# EAGLE board MM2_plates (EAGLE 7.4.0)
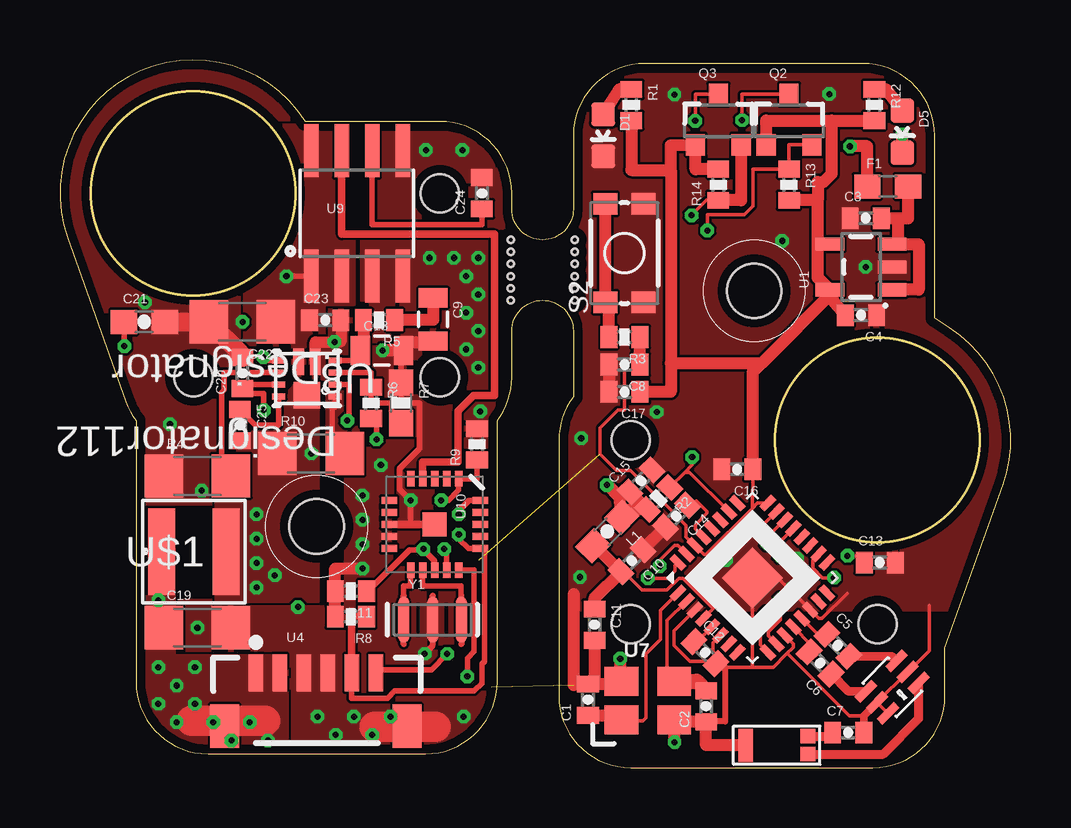
[diagram p0: board, top side]
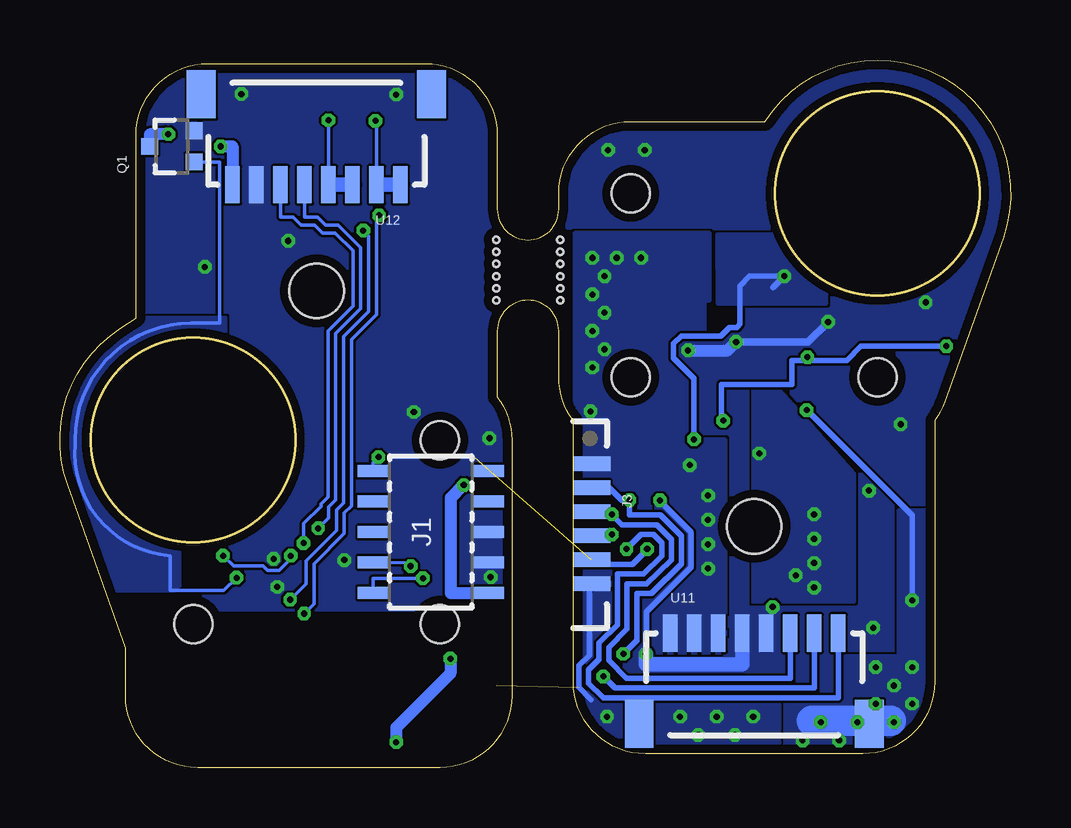
[diagram p1: board, bottom side, seen from below]

Size 39.63 x 29.51 mm. Coordinates in mm from the lower left corner, seen from the top.
Outline: 20.8,13.66 20.8,3 arc90 23.8,0 33.89,0 arc90 36.89,3 36.89,4.99 39.31,11.8 arc77 37.09,18.33 36.46,18.74 36.46,26.36 arc90 33.46,29.36 24.4,29.36 arc90 21.4,26.36 21.4,23.29 arc-180 18.83,23.29 18.83,23.95 arc90 15.84,26.94 10.24,26.94 arc167 0.32,22.09 2.74,15.28 arc18 3.17,14.48 3.17,3.58 arc90 6.17,0.58 15.23,0.58 arc90 18.23,3.58 18.23,14.48 arc37 18.83,16.28 18.83,18.21 arc-180 21.4,18.21 21.4,15.47 arc37 20.8,13.66
Outline: circle at 34.07,13.66 radius 4.26
Outline: circle at 5.55,23.95 radius 4.26
Copper layers (1*16): Top 0.0178mm / dielectric 59mil / Bottom 0.0178mm
Design rules "TA_eagle_rules_2_layer_v1-2 *": minimum track width 5mil, minimum drill 8mil, track to track 4mil, track to pad 5mil, pad to pad 5mil, via to via 5mil, smd to smd 5mil, copper to edge 15mil, drill to drill 15mil, minimum pad ring 6mil, minimum via ring 6mil, stop-mask expansion 3mil, vias tented up to drill 10mil, thermal gap 0mil
Holes 1.59 mm at 23.79,5.99 34.07,5.99 23.79,13.66 15.84,16.28 5.55,16.28 15.84,23.95
Holes 2.26 mm at 10.7,10.06 28.93,19.88
Holes 0.25 mm at 18.78,22.02 18.78,21.51 18.78,21 18.78,20.5 18.78,19.99 18.78,19.48 21.45,22.02 21.45,21.51 21.45,21 21.45,20.5 21.45,19.99 21.45,19.48
tKeepout: area 27.9,0 to 31.8,6.4
tRestrict: area 4.9,7.1 to 6.3,10.9

## Footprints (pad centres in the part's own frame; a part is rotated, then mirrored left to right if it is on the bottom)
0402-CAP = smd 0.7 x 0.9: 1 -0.65,0; 2 0.65,0
0805 = smd 0.8 x 1.2: 1 -0.9,0; 2 0.9,0
1206 = smd 1.6 x 1.8: 1 -1.4,0; 2 1.4,0
0603-CAP = smd 1.1 x 1: 1 -0.85,0; 2 0.85,0
LED-0603 = smd 1 x 1: A 0,-0.877; C 0,0.877
0603 = smd 1.1 x 1: 1 -0.85,0; 2 0.85,0
SAMTECH_FTSH-105-01 = smd 0.508 x 1.27: 1 -2.54,-2.413; 2 -2.54,2.413; 3 -1.27,-2.413; 4 -1.27,2.413; 5 0,-2.413; 6 0,2.413; 7 1.27,-2.413; 8 1.27,2.413; 9 2.54,-2.413; 10 2.54,2.413
1X06-1MM = smd 0.6 x 1.55: 1 -2.54,1.27; 2 -1.54,1.27; 3 -0.54,1.27; 4 0.46,1.27; 5 1.46,1.27; 6 2.46,1.27
SOT323 = smd 0.7 x 0.7: 1 -0.65,-0.925; 2 0.65,-0.925; 3 0,0.925
SOT23-3 = smd 0.8 x 0.9: 1 -0.95,-1; 2 0.95,-1; 3 0,1.1
0402-RES = smd 0.7 x 0.9: 1 -0.65,0; 2 0.65,0
0603-RES = smd 1.1 x 1: 1 -0.85,0; 2 0.85,0
TACTILE_SWITCH_SMD_4.6X2.8MM = smd 0.9 x 1: 1 -2.05,-0.8; 2 2.05,-0.8; 3 2.05,0.8; 4 -2.05,0.8
SOT23-5 = smd 0.55 x 1.2: 1 -0.95,-1.3; 2 0,-1.3; 3 0.95,-1.3; 4 0.95,1.3; 5 -0.95,1.3
QFN32 = smd 0.7 x 0.3: 1 -2.65,1.75; 2 -2.65,1.25; 3 -2.65,0.75; 4 -2.65,0.25; 5 -2.65,-0.25; 6 -2.65,-0.75; 7 -2.65,-1.25; 8 -2.65,-1.75; 17 2.65,-1.75; 18 2.65,-1.25; 19 2.65,-0.75; 20 2.65,-0.25; 21 2.65,0.25; 22 2.65,0.75; 23 2.65,1.25; 24 2.65,1.75 | smd 0.3 x 0.7: 9 -1.75,-2.65; 10 -1.25,-2.65; 11 -0.75,-2.65; 12 -0.25,-2.65; 13 0.25,-2.65; 14 0.75,-2.65; 15 1.25,-2.65; 16 1.75,-2.65; 25 1.75,2.65; 26 1.25,2.65; 27 0.75,2.65; 28 0.25,2.65; 29 -0.25,2.65; 30 -0.75,2.65; 31 -1.25,2.65; 32 -1.75,2.65 | smd 1.8 x 1.8: 33 0,0
EM406 = smd 0.6 x 1.55: 1 0,0; 2 1,0; 3 2,0; 4 3,0; 5 4,0; 6 5,0 | smd 1.2 x 1.8: P$1 -1.3,-2.225; P$2 6.3,-2.225
ANT_BAR = smd 0.62 x 0.61: 1 -1.3,0.37; 2 -1.3,-0.38 | smd 0.62 x 1.36: 3 1.3,0
0805_BALUN = smd 1 x 0.35: 1 -0.9,0.65; 2 -0.9,0; 3 -0.9,-0.65; 4 0.9,-0.65; 5 0.9,0; 6 0.9,0.65
FA-238 = smd 1.4 x 1.2: 1 0,-1.6; 2 2.2,-1.6; 3 2.2,0; 4 0,0
RNR0011A = smd 0.55 x 0.25: 1 -1.175,0.75; 2 -1.175,0.25; 3 -1.175,-0.25; 4 -1.175,-0.75; 7 1.175,-0.75; 8 1.175,-0.25; 9 1.175,0.25; 10 1.175,0.75 | smd 0.45 x 1.1: 5 -0.35,-0.7; 6 0.35,-0.7 | smd 1.1 x 1.1: 11 0,0.7
SO08 = smd 0.61 x 2.21: 1 -1.905,-2.616; 2 -0.635,-2.616; 3 0.635,-2.616; 4 1.905,-2.616; 5 1.905,2.616; 6 0.635,2.616; 7 -0.635,2.616; 8 -1.905,2.616
QFN20 = smd 1 x 1: 0 0,0 | smd 0.65 x 0.3: 1 -1.9,1; 2 -1.9,0.5; 3 -1.9,0; 4 -1.9,-0.5; 5 -1.9,-1; 11 1.9,-1; 12 1.9,-0.5; 13 1.9,0; 14 1.9,0.5; 15 1.9,1 | smd 0.3 x 0.65: 6 -1,-1.9; 7 -0.5,-1.9; 8 0,-1.9; 9 0.5,-1.9; 10 1,-1.9; 16 1,1.9; 17 0.5,1.9; 18 0,1.9; 19 -0.5,1.9; 20 -1,1.9
EB-85A = smd 0.6 x 1.55: 1 0,0; 2 1,0; 3 2,0; 4 3,0; 5 4,0; 6 5,0; 7 6,0; 8 7,0 | smd 1.2 x 2: P$1 -1.3,-3.775; P$2 8.3,-3.775
XAL4020 = smd 1.118 x 3.607: 1 -1.346,0; 2 1.346,0
RESONATOR-SMD = smd 0.45 x 1.905: 1 -1.2,0; 2 0,0; 3 1.2,0

## Placement (x,y rotation side)
C1  9 pF  [0402-CAP]  22.01,2.84 90 top
C2  9 pF  [0402-CAP]  26.94,2.56 90 top
C3  1.0 uF  [0402-CAP]  33.59,22.91 0 top
C4  2.2 uF  [0402-CAP]  33.39,18.87 180 top
C5  22 pF C0G 5%  [0402-CAP]  32.42,5.1 315 top
C6  22 pF C0G 5%  [0402-CAP]  31.69,4.37 135 top
C7  DNP  [0402-CAP]  32.86,1.47 0 top
C8  0.1 uF  [0402-CAP]  23.53,16.81 180 top
C9  1.2 nF  [0805]  15.56,18.69 270 top
C10  10 uF  [0402-CAP]  23.84,8.63 225 top
C11  0.1 uF  [0402-CAP]  22.29,5.97 270 top
C12  0.1 uF  [0402-CAP]  26.89,4.8 315 top
C13  0.1 uF  [0402-CAP]  34.18,8.56 0 top
C14  0.1 uF  [0402-CAP]  25.69,10.49 225 top
C15  0.1 uF  [0402-CAP]  24.22,11.96 45 top
C16  0.1 uF  [0402-CAP]  28.23,12.44 180 top
C17  10 uF  [0402-CAP]  23.53,15.67 180 top
C18  62 pF  [0805]  13.42,17.4 0 top
C19  47 uF  [1206]  5.73,5.84 0 top
C20  100 nF  [0402-CAP]  7.61,16.46 90 top
C21  2.2 uF  [0603-CAP]  3.52,18.59 0 top
C22  47 uF  [1206]  7.61,18.59 180 top
C23  0.1 uF  [0402-CAP]  11.06,18.66 0 top
C24  1 nF  [0402-CAP]  17.59,23.95 90 top
C25  100 nF  [0402-CAP]  7.51,14.28 270 top
D1  BLUE  [LED-0603]  22.64,26.36 180 top
D5  BLUE  [LED-0603]  35.12,26.52 180 top
F1  PTC0603  [0603]  34.51,24.23 0 top
J1  CORTEX_DEBUGSMD  [SAMTECH_FTSH-105-01]  24.17,9.83 90 bottom
J3  [1X06-1MM]  18.73,10.13 270 bottom
L1  10 uH  [0603]  22.82,9.85 225 top
Q1  MOSFET-NCHANNEL2N7002PW  [SOT323]  34.96,25.91 90 bottom
Q2  MOSFET-NCHANNELAO3404A  [SOT23-3]  30.39,26.97 0 top
Q3  MOSFET-NCHANNELAO3404A  [SOT23-3]  27.44,26.97 0 top
R1  330  [0402-RES]  23.81,27.63 270 top
R2  10k  [0402-RES]  24.96,11.22 225 top
R3  330  [0402-RES]  23.53,17.96 180 top
R4  143k  [1206]  5.73,12.16 0 top
R5  22.6k  [0402-RES]  13.3,18.67 180 top
R6  243k  [0402-RES]  12.97,15.21 270 top
R7  82k  [0603-RES]  14.21,15.21 270 top
R8  10k  [0402-RES]  12.13,6.3 180 top
R9  10k  [0402-RES]  17.39,13.49 90 top
R10  523k  [1206]  10.47,13.1 0 top
R11  10k  [0402-RES]  12.13,7.36 180 top
R12  330  [0402-RES]  33.95,27.63 270 top
R13  10k  [0402-RES]  30.39,24.31 270 top
R14  10k  [0402-RES]  27.44,24.31 90 top
S2  SWITCH-MOMENTARY-2SMD-4.6X2.8MM  [TACTILE_SWITCH_SMD_4.6X2.8MM]  23.53,21.46 90 top
U1  3.3V  [SOT23-5]  33.39,20.88 90 top
U2  ATSAMR21E18A-MUT  [QFN32]  28.87,7.92 45 top
U4  EM406  [EM406]  8.17,3.96 0 top
U5  PULSE_ANT_2.4GHZ  [ANT_BAR]  29.88,0.94 180 top
U6  JOHANSON_2450BM15A0015E  [0805_BALUN]  34.7,3.36 225 top
U7  FA-238  [FA-238]  23.41,3.6 0 top
U8  Value  [RNR0011A]  10.29,16.23 180 top
U9  ACS712  [SO08]  12.38,23.11 0 top
U10  ATTINY84ATTINY84-20MU  [QFN20]  15.62,10.15 270 top
U11  EB-85ASMD  [EB-85A]  14.19,5.61 0 bottom
U12  EB-85ASMD  [EB-85A]  25.44,24.31 180 bottom
U$1  XAL4020-122MEB  [XAL4020]  5.58,9.02 0 top
Y1  16MHZ  [RESONATOR-SMD]  15.53,6.17 0 top

## Library data of the parts
C1-C25 L1 R1-R3 R5-R9 R11-R14 = SparkFun-Passives
D1 D5 = SparkFun-LED; PROD_ID: DIO-08575
F1 = SparkFun-PowerIC
J1 U4 U11 U12 = SparkFun-Connectors
J3 = CSL_Components
Q1 = SparkFun-DiscreteSemi; PROD_ID: TRANS-11151
Q2 Q3 = SparkFun-DiscreteSemi; PROD_ID: TRAN-12988
R4 R10 = SparkFun-Resistors
S2 = SparkFun-Electromechanical; PROD_ID: SWCH-13065
U1 = SparkFun-PowerIC; PROD_ID: VREG-12457
U2 = atmel-samr21
U5 = bar_antenna
U6 = balun
U7 = crystals
U8 = TPS61089RNRR_4.8V; MANUFACTURER: Texas Instruments; MANUFACTURER_NAME: Texas Instruments; MANUFACTURER_PART_NUMBER: TPS61089RNRR; PARTNUMBER: TPS61089RNRR; REFDES: RefDes; TYPE: TYPE
U9 = SparkFun-AnalogIC; PROD_ID: IC-08964
U10 = SparkFun-DigitalIC
U$1 = TPS61089RNRR_4.8V
Y1 = SparkFun-FreqCtrl; PROD_ID: XTAL-08900

## Nets
3.3V: C4.2 C15.1 C16.1 C17.1 J1.1 L1.1 Q2.1 Q3.1 R1.2 R2.2 R12.2 R13.2 R14.2 U1.5 U2.24 U2.30
AVDD: C12.1 U2.5
BLINK: Q1.1 U2.18
CURSENSE: U9.7 U10.4
DVDD: C13.1 U2.21
GND: C1.2 C2.1 C3.1 C4.1 C7.2 C8.2 C9.2 C10.1 C11.2 C12.2 C13.2 C14.2 C15.2 C16.2 C17.2 C18.2 C19.2 C20.2 C21.2 C22.2 C23.2 C24.2 D1.C J1.3 J1.5 J3.6 Q1.2 R4.1 R7.1 S2.1 S2.2 U1.2 U2.3 U2.6 U2.11 U2.14 U2.33 U4.3 U4.4 U5.3 U6.2 U6.5 U6.6 U7.2 U7.4 U8.5 U9.5 U10.8 U11.4 U11.5 U12.7 Y1.2
MOTSIG0: U10.14 U11.8
MOTSIG1: U10.15 U11.7
MOTSIG2: J3.3 U10.20 U11.6
N$1: F1.1 U12.8
N$2: R3.2 S2.3 S2.4
N$3: R4.2 U8.8
N$4: U10.12 Y1.3
N$5: U10.11 Y1.1
N$6: U5.1 U6.1
N$7: C7.1 U5.2
N$8: D1.A R1.1
N$10: C5.2 U6.3
N$11: C6.1 U6.4
N$14: C9.1 R5.1
N$15: C18.1 R5.2 U8.4
N$16: C24.1 U9.6
N$19: C21.1 U8.2 U8.7
N$20: D5.A R12.1
N$21: D5.C Q1.3
N$27: C25.1 U8.10
N$28: C25.2 R10.1 U8.11 U$1.2
N$29: R10.2 U8.1
N$31: R6.1 R7.2 U8.3
PA24/USBDM: U2.22 U12.6
PA25/USBDP: U2.23 U12.5
RESET: C8.1 J1.10 J3.5 R2.1 R3.1 R11.1 U2.26 U10.13
RFN: C5.1 U2.13
RFP: C6.2 U2.12
SCL: J3.2 R9.1 U4.6 U10.1
SCL_HV: Q2.3 U12.3 U12.4
SCL_LV: Q2.2 R13.1 U2.10
SDA: J3.4 R8.1 U4.5 U10.16
SDA_HV: Q3.3 U12.1 U12.2
SDA_LV: Q3.2 R14.1 U2.9
SWCLK: J1.4 U2.31
SWDIO: J1.2 U2.32
V_BATT: C19.1 C20.1 U4.1 U4.2 U8.9 U$1.1
V_MOT_UNSENSE: C22.1 C23.1 R6.2 U8.6 U9.1 U9.2 U9.8
VDDANA: C10.2 C11.1 L1.2 U2.4
VDDCORE: C14.1 U2.29
VIN: C3.2 F1.2 U1.1 U1.3
VMOT: J3.1 R8.2 R9.2 R11.2 U9.3 U9.4 U10.9 U11.1 U11.2 U11.3
XIN: C1.1 U2.1 U7.1
XOUT: C2.2 U2.2 U7.3

## Tracks (layer width: path | path; a pad name or v marks a point on that pad's centre or on a via)
3.3V  (via drill 0.25)
  Top 0.152: 23.63,10.3 L1.1 | 28.87,10.82 26.94,8.89 26.84,8.89 U2.30 26.1,9.63 26.1,10.11 25.21,11 25.03,11 24.8,10.76 R2.2 | 28.87,10.82 C16.1 | U2.24 29.08,11.03 28.87,10.82
  Top 0.508: C15.1 R2.2 23.73,10.76 L1.1 23.32,11.28 22.81,11.78 v22.8,11.78 | 25.46,24.93 25.46,16.86 | 25.46,16.86 25.46,15.67 C17.1 | U1.5 32.29,19.91 29.25,16.86 | 29.25,16.86 25.46,16.86 | C4.2 32.29,19.39 U1.5 | 31.59,23.66 31.59,20.43 U1.5 | 32.17,26.98 32.17,24.76 31.82,24.42 31.59,24.42 31.59,23.66 | 32.17,26.98 R12.2 | R1.2 23.81,24.93 25.46,24.93 | C16.1 28.88,16.5 29.25,16.86 | 25.46,24.93 25.46,25.95 Q3.1 26.5,24.96 R14.2 | Q2.1 29.44,26.98 32.17,26.98 | 31.59,23.66 R13.2
  Bottom 0.508: J1.1 23.33,7.29 23.33,11.25 v22.8,11.78
AVDD
  Top 0.152: U2.5 26.74,5.44 C12.1
BLINK  (via drill 0.25)
  Top 0.152: U2.18 31.38,8.67 31.38,8.33 31.79,7.92 v32.27,7.92
  Bottom 0.152: v32.27,7.92 32.8,7.39 35.04,7.39 35.04,8.84 arc90 39,13.49 39,13.69 arc90 34.15,18.54 32.98,18.54 32.98,25.26 Q1.1
  pour Bottom: 34.63,9.93 34.63,7.59 34.86,7.36 38.75,7.36 41.11,9.73 41.11,14.88 37.22,18.77 32.73,18.77 32.73,11.83
CURSENSE
  Top 0.305: U10.4 15.12,12.75 16.6,12.75 16.6,14.88 17.23,15.52 18.12,15.52 18.12,22.25 11.75,22.25 U9.7
DVDD  (via drill 0.25)
  Top 0.152: U2.21 30.01,9.42 v30.01,8.84 | C13.1 33.25,8.84 v32.83,8.84
  Bottom 0.152: v32.83,8.84 32.4,8.41 31.15,8.41 30.98,8.23 30.49,8.23 30.01,8.71 v30.01,8.84
GND  (via drill 0.25)  (1 unrouted)
  Top 0.152: U6.6 U6.5 U6.2 | U2.11 30.57,5.16 30.57,5.03 30.29,4.75 | 30.29,4.75 29.73,4.19 28.87,4.19 | 28.87,4.19 27.43,4.19 C12.2 | U2.3 25.59,5.71 25.59,5.1 26.25,4.44 27.25,4.44 C12.2 | U2.6 27.22,5.21 27.22,4.85 27.35,4.72 C12.2 | 28.87,4.19 U2.33 29.93,7.92 U2.14 31.63,6.22 31.76,6.22 32.81,7.27 | 33.51,2.17 32.92,2.17 30.34,4.75 30.29,4.75 | 35.47,4.11 36.23,4.87 36.23,6.78
  Top 0.229: C18.2 14.21,17.4 R7.1 14.21,15.21 15,15.21 15,13.31 14.16,12.47 14.16,11.61 v14.62,11.15 14.62,10.15 U10.8 | 15.53,5.15 15.53,5.08 v15.2,4.75
  Top 0.254: 27.43,4.19 27.72,4.19 27.72,1.93 26.94,1.93 C2.1
  Top 0.305: C7.2 33.51,2.17 U6.5 | U10.8 15.61,10.15 15.61,10.16
  Top 0.457: U8.5 10.64,17.75 v11.44,17.75 11.71,17.75 C23.2
  Top 0.508: C1.2 23.29,3.49 U7.4 23.36,3.6 v23.36,4.54 | C14.2 C10.1 | C8.2 C17.2 | U5.3 26.94,0.94 C2.1 25.61,1.91 U7.2 | C11.2 22.29,3.77 C1.2 | C1.2 21.43,3.44 21.43,7.24 | v25.62,1.06 25.62,2.06 | C9.2 15.56,17.73 14.32,17.73 C18.2 | 14.21,17.4 v13.45,17.4
  Top 0.762: C21.2 C22.2 7.51,17.29 C20.2
  Top 1.27: 15.66,1.7 13.12,1.7
  Bottom 0.229: v14.62,11.15 14.62,11.12 13.32,9.83 13.32,8.35 15.18,6.5 15.18,4.77 | v15.2,4.75 15.18,4.77 | 15.18,4.77 15.18,4.57 15.15,4.54 15.15,4.65 15.23,4.72 | J3.6 17.56,7.67 17.56,4.7 18,4.26 18,3.35 17.49,2.84
  Bottom 0.305: v7.61,18.59 8.45,17.75 v11.44,17.75
  Bottom 0.508: v23.36,4.54 23.36,3.93 25.62,1.67 v25.62,1.06 | v13.45,17.4 11.8,17.4 v11.44,17.75
  Bottom 0.61: U11.4 11.19,4.32 15.2,4.32 v15.2,4.75
  other vias: 30.57,7.54 27.77,8.66 33.59,20.88 21.73,13.74 24.88,14.83 9.92,6.7 16.83,2.13 15.25,25.75 16.78,25.75 4.58,14.32 3.54,19.4 13.78,2.13 12.26,2.13 10.73,2.13 11.49,1.37 13.02,1.37 5.73,5.84 25.62,28.06 32.07,28.09 30.11,21.97 21.68,7.95 30.72,8.71 5.91,11.55
  pour Bottom (rank 2): 19.93,6.58 40.32,6.58 40.47,32.2 20.08,32.2
  pour Top (rank 2): 40.3,6.58 19.9,6.58 20.05,30.81 40.45,30.81
  pour Top (rank 2): -1.1,30.4 19.47,30.4 19.47,-0.08 -1.1,-0.08
  pour Bottom (rank 2): 19.47,30.4 -1.1,30.4 -1.1,-0.08 19.47,-0.08
MOTSIG0  (via drill 0.25)
  Top 0.229: U10.14 16.12,9.01 v16.02,9.12
  Bottom 0.229: v16.02,9.12 15.41,9.73 14.9,9.73 14.54,9.37 14.54,8.84 15.3,8.07 16.4,8.07 16.4,7.57 16.4,7.39 16.4,5.97 17.16,5.2 17.16,4.52 17.59,4.09 17.59,3.53 16.98,2.92 7.19,2.92 U11.8
MOTSIG1  (via drill 0.25)
  Top 0.229: U10.15 17.26,8.25 17.26,4.85 16.98,4.57 v16.98,3.81
  Bottom 0.229: U11.7 8.19,3.33 16.5,3.33 v16.98,3.81
MOTSIG2  (via drill 0.25)
  Top 0.229: U10.20 17.05,11.15 16.62,10.72
  Top 0.305: 16.62,10.72 v16.62,10.56
  Bottom 0.229: v16.62,10.56 16.19,10.13 14.75,10.13 14.14,9.52 14.14,8.66 15.18,7.67 15.99,7.67 15.99,5.79 16.75,5.03 16.75,4.47 16.02,3.73 9.19,3.73 U11.6
  Bottom 0.305: v16.62,10.56 16.73,10.67 J3.3
N$1  (via drill 0.25)
  Top 0.508: F1.1 33.66,25.91 v32.93,25.91
  Bottom 0.508: v32.93,25.91 32.44,25.91 U12.8
N$2
  Top 0.508: R3.2 22.88,19.26 S2.4 S2.3
N$3
  Top 0.229: 6.77,12.16 R4.2 7.13,12.85 6.74,12.85 6.74,15.64 6.85,15.77 6.85,16.48 U8.8
N$4
  Top 0.229: U10.12 15.12,7.59 16.73,7.59 16.73,6.86 16.73,7.19
N$5
  Top 0.229: U10.11 14.62,7.59 14.33,7.59 Y1.1
N$6
  Top 0.381: U5.1 34.31,0.57 35.8,2.06 U6.1
N$7
  Top 0.381: U5.2 32.21,1.32 C7.1
N$8
  Top 0.508: R1.1 23.31,28.28 D1.A
N$10
  Top 0.356: C5.2 34.69,4.64 U6.3
N$11
  Top 0.356: U6.4 32.87,3.18 C6.1
N$12
  Top 0: 14.41,12.38 14.41,12.37
N$14
  Top 0.508: C9.1 15.56,18.67 R5.1
N$15
  Top 0.229: C18.1 12.52,16.98 U8.4
  Top 0.508: R5.2 12.65,17.4 C18.1
N$16
  Top 0.229: C24.1 17.59,22.65 13.02,22.65 U9.6
N$19  (via drill 0.25)
  Top 0.229: U8.2 12.05,15.98 12.05,14.55 v11.98,14.48 | C21.1 v2.67,17.59 v2.68,17.57 | U8.7 8.61,16.98 v8.47,17.12
  Bottom 0.229: v2.68,17.57 6.24,17.57 6.83,16.98 8.61,16.98 | v11.98,14.48 12.05,14.55 12.05,15.98 9.12,15.98 U8.7 8.61,16.98 | 8.61,16.98 v8.47,17.12
N$20
  Top 0.508: R12.1 34.43,28.28 D5.A
N$21  (via drill 0.25)
  Top 0.508: D5.C v35.12,26.41
  Bottom 0.508: v35.12,26.41 35.89,26.41 Q1.3
N$27
  Top 0.229: 9.19,15.48 U8.10 9.12,14.3 8.14,14.3 C25.1
N$28  (via drill 0.25)
  other vias: 10.48,13.1 8.19,10.56 8.19,9.55 8.19,8.53 8.95,8.02 8.19,7.52
  pour Top (no thermals): 9.84,15.97 10.73,15.97 10.73,6.93 6.54,6.96 6.54,12.27 8.5,14.48
  pour Bottom (no thermals): 9.84,15.95 10.73,15.95 10.73,6.91 6.54,6.93 6.54,12.24 8.5,14.45
N$29
  Top 0.229: U8.1 11.47,15.03 11.34,15.03 11.34,13.1 R10.2
  pour Top: 11.14,15.67 12.59,15.69 12.59,12.27 11.14,12.24
N$31
  Top 0.229: U8.3 12.97,16.48 R6.1 12.97,15.21 13.83,15.21 13.83,14.36 R7.2
PA24/USBDM  (via drill 0.25)
  Top 0.152: U2.22 29.48,9.62 v29.48,9.37
  Bottom 0.152: v29.48,9.37 29.48,10.18 28.74,10.89 28.74,11 28.46,11.3 28.46,18.21 27.42,19.25 27.42,21.56 28.16,22.3 28.69,22.3 29.02,22.63 29.58,22.63 29.91,22.96 30.42,22.96 30.44,22.96 U12.6
PA25/USBDP  (via drill 0.25)
  Top 0.152: U2.23 29.16,9.98 v28.87,9.98
  Bottom 0.152: v28.87,9.98 28.44,10.41 28.44,10.87 28.13,11.17 28.13,18.11 27.09,19.15 27.09,21.69 28.03,22.63 28.56,22.63 28.89,22.96 29.43,22.96 29.44,22.96 U12.5
RESET  (via drill 0.25)  (1 unrouted)
  Top 0.152: 26.05,12.32 R2.1 25.11,11.68 24.91,11.48 24.7,11.48 23.79,12.39 23.2,12.39 22.52,13.08 22.52,14.17 23.25,14.91 23.53,14.91 23.53,16.58 24.18,16.58 C8.1 | 26.05,12.32 26.35,12.62 v26.35,12.95 | U2.26 26.24,12.32 26.05,12.32
  Top 0.229: U10.13 15.62,8.62 15.15,9.09 | 15.15,9.09 v15.15,9.12 | 15.15,9.09 14.57,9.09 12.84,7.36 R11.1
  Top 0.508: C8.1 R3.1
  Bottom 0.152: v26.35,12.95 26.58,12.72 J1.10
  Bottom 0.229: J3.5 17.46,8.48 15.76,8.48 15.15,9.09 v15.15,9.12
RFN
  Top 0.152: U2.13 31.63,5.51 C5.1
RFP
  Top 0.152: U2.12 31.33,5.11 C6.2
SCL  (via drill 0.25)
  Top 0.229: v15.89,11.15 16.19,11.15 16.62,11.58 U10.1 17.39,12.05 R9.1 | v16.14,4.75 15.48,4.09 13.29,4.09 U4.6
  Bottom 0.229: J3.2 16.72,11.67 16.19,11.15 v15.89,11.15 15.89,10.54 14.59,10.54 13.73,9.68 13.73,8.51 14.97,7.26 15.58,7.26 15.58,5.31 v16.14,4.75
SCL_HV  (via drill 0.25)
  Top 0.152: Q2.3 28.44,28.07 v28.44,27
  Bottom 0.152: v28.44,27 U12.4
  Bottom 0.61: U12.4 U12.3
SCL_LV  (via drill 0.25)
  Top 0.152: v30.04,7.01 30.04,6.17 29.53,5.66 29.53,5.49 U2.10 | v26.99,22.4 26.99,23.06 28.54,23.06 28.89,23.42 28.89,24.96 R13.1 30.39,25.97 Q2.2
  Bottom 0.152: v30.04,7.01 29.38,7.67 29.38,8.63 28.11,9.9 28.11,10.74 27.8,11.05 27.8,17.98 26.76,19.02 26.76,22.17 v26.99,22.4
SDA  (via drill 0.25)
  Top 0.229: v16.62,9.73 16.62,9.55 17.03,9.15 U10.16 17.69,9.15 17.69,4.44 17.59,4.34 17.59,3.53 17.26,3.2 13.96,3.2 13.65,2.89 12.17,2.89 U4.5
  Top 0.305: R8.1 12.85,6.34 12.17,6.34 U4.5
  Bottom 0.305: v16.62,9.73 16.68,9.67 J3.4
SDA_HV  (via drill 0.25)
  Top 0.152: Q3.3 26.48,28.07 v26.48,26.97
  Bottom 0.152: v26.48,26.97 26.44,26.97 U12.2
  Bottom 0.61: U12.2 U12.1
SDA_LV  (via drill 0.25)
  Top 0.152: v29.45,6.42 29.2,6.17 29.2,5.12 U2.9 | R14.1 26.95,23.66 v26.33,23.04
  Top 0.508: Q3.2 28.4,23.66 R14.1
  Bottom 0.152: v29.45,6.42 29.05,6.83 29.05,8.51 27.78,9.78 27.78,10.61 27.47,10.92 27.47,17.85 26.43,18.9 26.43,22.93 v26.33,23.04
SWCLK  (via drill 0.25)
  Top 0.152: U2.31 25.75,9.27 25.62,9.27 25.01,8.66 v25.01,8.41
  Bottom 0.152: v25.01,8.41 25.13,8.53 J1.4
SWDIO  (via drill 0.25)
  Top 0.152: U2.32 25.64,8.44 25.64,8.2 25.34,7.9 v24.5,7.9
  Bottom 0.152: v24.5,7.9 26.58,7.9 J1.2
V_BATT  (via drill 0.25)
  Top 0.152: v6.39,1.9 5.42,1.9 5.37,1.95 6.03,1.95
  Top 0.229: U8.9 7.73,15.98 C20.1 7.51,15.59 8.5,15.59 v8.5,14.91
  Top 1.27: 8.55,1.95 6.03,1.95 5.5,1.95
  Bottom 0.229: v8.5,14.91 4.1,10.51 v4.1,6.98
  Bottom 1.27: 8.29,1.95 4.99,1.95
  other vias: 4.1,4.19 5.63,4.19 4.86,3.43 5.63,2.66 4.1,2.66 4.86,1.9 7.91,1.9 7.15,1.14 8.67,1.14
  pour Top: 4.71,10.72 2.1,10.72 2.1,0.73 9.44,0.73 9.44,4.62 4.71,4.62
  pour Bottom: 4.64,10.72 2.02,10.72 2.02,0.73 9.36,0.73 9.36,4.62 4.64,4.62
V_MOT_UNSENSE  (via drill 0.25)
  Top 0.229: R6.2 13.2,14.56 v13.2,13.69 | v9.44,20.5 U9.1
  Bottom 0.229: 9.92,20.01 v9.44,20.5 10.88,20.5 11.29,20.09 11.29,18.49 11.42,18.36 11.72,18.36 12.08,18.01 13.73,18.01 14.06,17.68 14.06,17.09 13.2,16.23 v13.2,13.69
  pour Top: 9.72,16.38 10.17,16.38 10.17,17.6 10.99,17.6 10.99,19.33 12.23,19.33 12.23,26.77 7.71,26.77 7.71,17.65 9.72,17.65
  pour Bottom: 12.2,19.35 7.71,19.35 7.71,22.22 12.23,22.22
VDDANA
  Top 0.152: U2.4 27.22,6.63 27.22,6.65 25.97,7.9 25.79,7.9 25.31,7.41 24.27,7.41 23.51,8.17 C10.2 | 23.63,7.92 C10.2 | 23.38,8 C10.2 | 23.3,8.1 C10.2
  Top 0.508: L1.2 22.45,9.1 C10.2 22.29,7.08 C11.1
VDDCORE
  Top 0.152: U2.29 26.48,9.96 26.48,10.13 26.96,10.61 26.96,10.69 26.53,11.12 C14.1
VIN
  Top 0.508: U1.1 35.8,19.93 35.8,21.83 U1.3 34.94,21.83 34.94,22.91 | C3.2 34.94,22.91 | 34.94,22.91 35.36,22.91 F1.2
VMOT  (via drill 0.25)
  Top 0.508: R11.2 R8.2 11.48,8.3 v12.61,8.3
  other vias: 15.41,21.26 17.51,14.86 16.42,21.26 17.44,21.26 16.93,20.5 17.44,19.73 16.93,18.97 17.44,18.21 16.93,17.45 17.44,16.69 13.37,12.62 12.61,11.35 12.61,10.34 12.61,9.32
  pour Top: 12.81,19.5 12.61,19.5 12.61,19.99 12.61,22.27 18.17,22.27 18.17,12.19 16.73,12.19 16.73,4.72 11.95,4.72 11.95,13.66 12.28,13.66 12.81,13.66
  pour Bottom: 12.79,19.5 12.59,19.5 12.59,22.27 18.15,22.27 18.15,12.19 16.7,12.19 16.7,4.72 11.93,4.72 11.93,13.66 12.79,13.66
XIN
  Top 0.152: U7.1 23.46,1.95 24.3,1.95 24.42,2.08 24.42,4.75 25.03,5.36 25.03,6.56 U2.1
  Top 0.508: C1.1 23.22,2.19 U7.1
XOUT
  Top 0.152: 25.31,3.9 U7.3 25.26,3.95 25.31,4 25.31,6.13 U2.2
  Top 0.635: U7.3 26.55,3.6 C2.2

## Text on the board
210bmp: MINI / MOJO | MINI / MOJO | CSL 2016 | CSL 2016